# EAGLE board dual.vca.main.old (EAGLE 9.6.2)

Size 100 x 80 mm. Coordinates in mm from the lower left corner, seen from the top.
Outline: 0,0 100,0 100,80 0,80 0,0
Copper layers (1*16): Top 0.035mm / dielectric 1.5mm / Bottom 0.035mm
Design rules "default": minimum track width 6mil, minimum drill 0.35mm, track to track 6mil, track to pad 6mil, pad to pad 6mil, via to via 6mil, smd to smd 6mil, copper to edge 40mil, drill to drill 6mil, minimum pad ring 10mil, minimum via ring 8mil, stop-mask expansion 4mil, vias tented up to drill 0mil, thermal gap 10mil

## Footprints (pad centres in the part's own frame; a part is rotated, then mirrored left to right if it is on the bottom)
C025-024X044 = drill 0.813 octagon: 1 -1.27,0; 2 1.27,0
E2-5 = drill 0.813 pad 1.27: + -1.016,0 | drill 0.813 pad 1.27 octagon: - 1.016,0
DO34-5 = drill 0.813 long: A 2.54,0; C -2.54,0
DIL14 = drill 0.813 long: 1 -7.62,-3.81; 2 -5.08,-3.81; 3 -2.54,-3.81; 4 0,-3.81; 5 2.54,-3.81; 6 5.08,-3.81; 7 7.62,-3.81; 8 7.62,3.81; 9 5.08,3.81; 10 2.54,3.81; 11 0,3.81; 12 -2.54,3.81; 13 -5.08,3.81; 14 -7.62,3.81
DIL08 = drill 0.813 pad 1.27: 1 -3.81,-3.81; 2 -1.27,-3.81; 3 1.27,-3.81; 4 3.81,-3.81; 5 3.81,3.81; 6 1.27,3.81; 7 -1.27,3.81; 8 -3.81,3.81
1X10 = drill 1.016 long: 1 -11.43,0; 2 -8.89,0; 3 -6.35,0; 4 -3.81,0; 5 -1.27,0; 6 1.27,0; 7 3.81,0; 8 6.35,0; 9 8.89,0; 10 11.43,0
2X05 = drill 1.016 octagon: 1 -5.08,-1.27; 2 -5.08,1.27; 3 -2.54,-1.27; 4 -2.54,1.27; 5 0,-1.27; 6 0,1.27; 7 2.54,-1.27; 8 2.54,1.27; 9 5.08,-1.27; 10 5.08,1.27
2X08 = drill 1.016 octagon: 1 -8.89,-1.27; 2 -8.89,1.27; 3 -6.35,-1.27; 4 -6.35,1.27; 5 -3.81,-1.27; 6 -3.81,1.27; 7 -1.27,-1.27; 8 -1.27,1.27; 9 1.27,-1.27; 10 1.27,1.27; 11 3.81,-1.27; 12 3.81,1.27; 13 6.35,-1.27; 14 6.35,1.27; 15 8.89,-1.27; 16 8.89,1.27
0207/7 = drill 0.813 octagon: 1 -3.81,0; 2 3.81,0
RTRIM3339P = drill 0.61: 1 -2.54,0; 2 0,-2.54; 3 2.54,0
TO92 = drill 0.813 octagon: 1 1.27,0; 2 0,1.905; 3 -1.27,0

## Placement (x,y rotation side)
C1  0.1uF  [C025-024X044]  55.88,66.04 0 top
C2  0.1uF  [C025-024X044]  50.8,66.04 0 top
C3  0.1uF  [C025-024X044]  96.52,71.12 0 top
C4  0.1uF  [C025-024X044]  91.44,71.12 0 top
C5  2.2 uF  [E2-5]  63.5,43.18 0 top
C6  2.2uF  [E2-5]  52.07,43.18 0 top
C7  100uF  [E2-5]  92.71,50.8 0 top
C8  100uF  [E2-5]  83.82,50.8 0 top
D1  1N4148  [DO34-5]  -3.81,-88.9 0 top  (outside the outline)
IC1  TL084P  [DIL14]  62.23,16.51 0 top
IC2  TL082P  [DIL08]  92.71,27.94 0 top
IC3  LM324N  [DIL14]  11.43,-21.59 0 top  (outside the outline)
JP1  VCA1-2  [1X10]  85.09,36.83 0 top
JP2  VCA3-4  [1X10]  85.09,44.45 0 top
JP3  [2X05]  55.88,25.4 0 top
JP4  [2X08]  11.43,-41.91 0 top  (outside the outline)
R1  15K  [0207/7]  76.2,49.53 0 top
R2  15K  [0207/7]  66.04,49.53 0 top
R3  1K  [RTRIM3339P]  93.98,16.51 0 top
R4  100K  [RTRIM3339P]  85.09,16.51 0 top
R5  100K  [RTRIM3339P]  76.2,16.51 0 top
R6  33K  [0207/7]  55.88,49.53 0 top
R7  5K  [0207/7]  93.98,55.88 0 top
R8  22K  [0207/7]  83.82,55.88 0 top
R9  100K  [0207/7]  73.66,55.88 0 top
R10  100K  [0207/7]  5.08,-58.42 0 top  (outside the outline)
R11  10K  [0207/7]  53.34,55.88 0 top
R12  10K  [0207/7]  93.98,60.96 0 top
R13  100K  [0207/7]  83.82,60.96 0 top
R14  470K  [0207/7]  73.66,60.96 0 top
R15  100K  [0207/7]  63.5,60.96 0 top
R16  100K  [0207/7]  53.34,60.96 0 top
R17  100K  [0207/7]  93.98,66.04 0 top
R18  1K  [0207/7]  83.82,66.04 0 top
R19  15K  [0207/7]  73.66,66.04 0 top
R20  100K  [0207/7]  5.08,-63.5 0 top  (outside the outline)
R21  100K  [0207/7]  5.08,-48.26 0 top  (outside the outline)
R22  100K  [0207/7]  5.08,-53.34 0 top  (outside the outline)
R23  1M  [0207/7]  5.08,-68.58 0 top  (outside the outline)
R24  1M  [0207/7]  5.08,-73.66 0 top  (outside the outline)
R25  250K  [RTRIM3339P]  -5.08,-68.58 0 top  (outside the outline)
R26  100K  [0207/7]  -3.81,-78.74 0 top  (outside the outline)
R27  100K  [0207/7]  -3.81,-83.82 0 top  (outside the outline)
R28  3.3K  [0207/7]  -3.81,-95.25 0 top  (outside the outline)
R29  3.3K  [0207/7]  -3.81,-100.33 0 top  (outside the outline)
R30  1.2K  [0207/7]  -3.81,-105.41 0 top  (outside the outline)
R31  1K  [0207/7]  -3.81,-110.49 0 top  (outside the outline)
T1  BC547  [TO92]  3.81,-3.81 0 top
T2  BC547  [TO92]  3.81,-8.89 0 top  (outside the outline)
T3  BC547  [TO92]  3.81,-13.97 0 top  (outside the outline)

## Library data of the parts
C1-C8 D1 R1 R2 R6-R24 R26-R31 = _common
IC1 IC3 = linear
IC2 = linear; DATA_SHEET: <a href="http://www.ti.com/lit/ds/symlink/tl084a.pdf"> Data sheet </a>
JP1-JP4 = pinhead
R3-R5 R25 = rcl; SPICEMODEL: X; SPICEPREFIXL: POT
T1-T3 = transistor

## Nets
0V: C1.2 C2.1 C7.- C8.+ IC1.3 IC2.3 IC3.5 JP1.1 JP1.2 JP1.9 JP1.10 JP2.1 JP2.2 JP2.9 JP2.10 JP3.3 JP3.4 JP3.5 JP3.6 JP3.7 JP3.8 JP4.1 JP4.16 R13.1 R18.1 R23.1 R24.1 R31.1 T2.2 T3.3
+12V: C1.1 C3.1 C4.1 C7.+ IC1.4 IC2.8 IC3.4 JP3.9 JP3.10 R3.2 R4.3 R5.3 R26.2
-12V: C2.2 C3.2 C4.2 C8.- IC1.11 IC2.4 IC3.11 JP3.1 JP3.2 R4.1 R5.1 R19.1 R27.1
CV1: JP1.5 JP4.7
CV2: JP1.6 R21.1
CV3: JP2.5
CV4: JP2.6
CVATT1B: JP4.9 R22.1
CVATT2A: JP4.6
CVATT2B: JP4.8
DRV1A: JP4.11
DRV1B: JP4.13
DRV2A: JP4.10
DRV2B: JP4.12
DRV2C: JP4.14
DVV1C: JP4.15
IN1: JP1.3 JP4.3
IN2: C6.+ JP1.7
IN3: JP2.3 JP4.2
IN4: JP2.7
INATT1B: C5.+ JP4.5
INATT2B: JP4.4
N$1: IC1.2 R10.2 R16.1 R20.2
N$2: IC1.6 R11.2 R15.1
N$3: IC1.1 R16.2 R17.1
N$4: R17.2 R18.2 T1.2
N$5: R1.1 R12.1 T1.3
N$6: R1.2 R3.1
N$7: R2.2 R3.3
N$8: R2.1 R11.1 T2.3
N$9: R6.2 T1.1 T2.1
N$10: R5.2 R14.1
N$11: C5.- R10.1
N$12: IC1.5 R12.2 R13.2 R14.2
N$13: R6.1 R19.2 T3.1
N$14: C6.- R20.1
N$15: R7.2 R8.2 T3.2
N$16: R4.2 R7.1
N$17: IC2.1 R8.1 R9.2
N$18: IC3.3 R24.2 R25.2
N$19: IC2.2 IC3.2 R9.1 R21.2 R22.2 R23.2
N$20: R25.3 R26.1
N$21: R25.1 R27.2
N$22: D1.C IC3.1
N$23: D1.A R28.1
N$24: IC3.6 R28.2 R29.1
N$25: IC3.7 R29.2 R30.1
OUT1: IC1.7 JP1.4 R15.2
OUT2: JP1.8 R30.2 R31.2
OUT3: JP2.4
OUT4: JP2.8

## Tracks (layer width: path | path; a pad name or v marks a point on that pad's centre or on a via)
0V  (29 unrouted)
+12V  (12 unrouted)
-12V  (12 unrouted)
CV1  (1 unrouted)
CV2  (1 unrouted)
CVATT1B  (1 unrouted)
IN1  (1 unrouted)
IN2  (1 unrouted)
IN3  (1 unrouted)
INATT1B  (1 unrouted)
N$1  (3 unrouted)
N$2  (2 unrouted)
N$3  (2 unrouted)
N$4  (2 unrouted)
N$5  (2 unrouted)
N$6  (1 unrouted)
N$7  (1 unrouted)
N$8  (2 unrouted)
N$9  (2 unrouted)
N$10  (1 unrouted)
N$11  (1 unrouted)
N$12  (3 unrouted)
N$13  (2 unrouted)
N$14  (1 unrouted)
N$15  (2 unrouted)
N$16  (1 unrouted)
N$17  (2 unrouted)
N$18  (2 unrouted)
N$19  (5 unrouted)
N$20  (1 unrouted)
N$21  (1 unrouted)
N$22  (1 unrouted)
N$23  (1 unrouted)
N$24  (2 unrouted)
N$25  (2 unrouted)
OUT1  (2 unrouted)
OUT2  (2 unrouted)